# Altium PCB Modulo_Nodo.PcbDoc
Units mm, origin at the board's own origin, x right, y up, seen from the top; angles counter-clockwise.
Board outline 92.2 x 47.62 mm, 2 copper layers (Top Layer, Bottom Layer); 43 components, 40 nets, 199 pads, 6 vias.
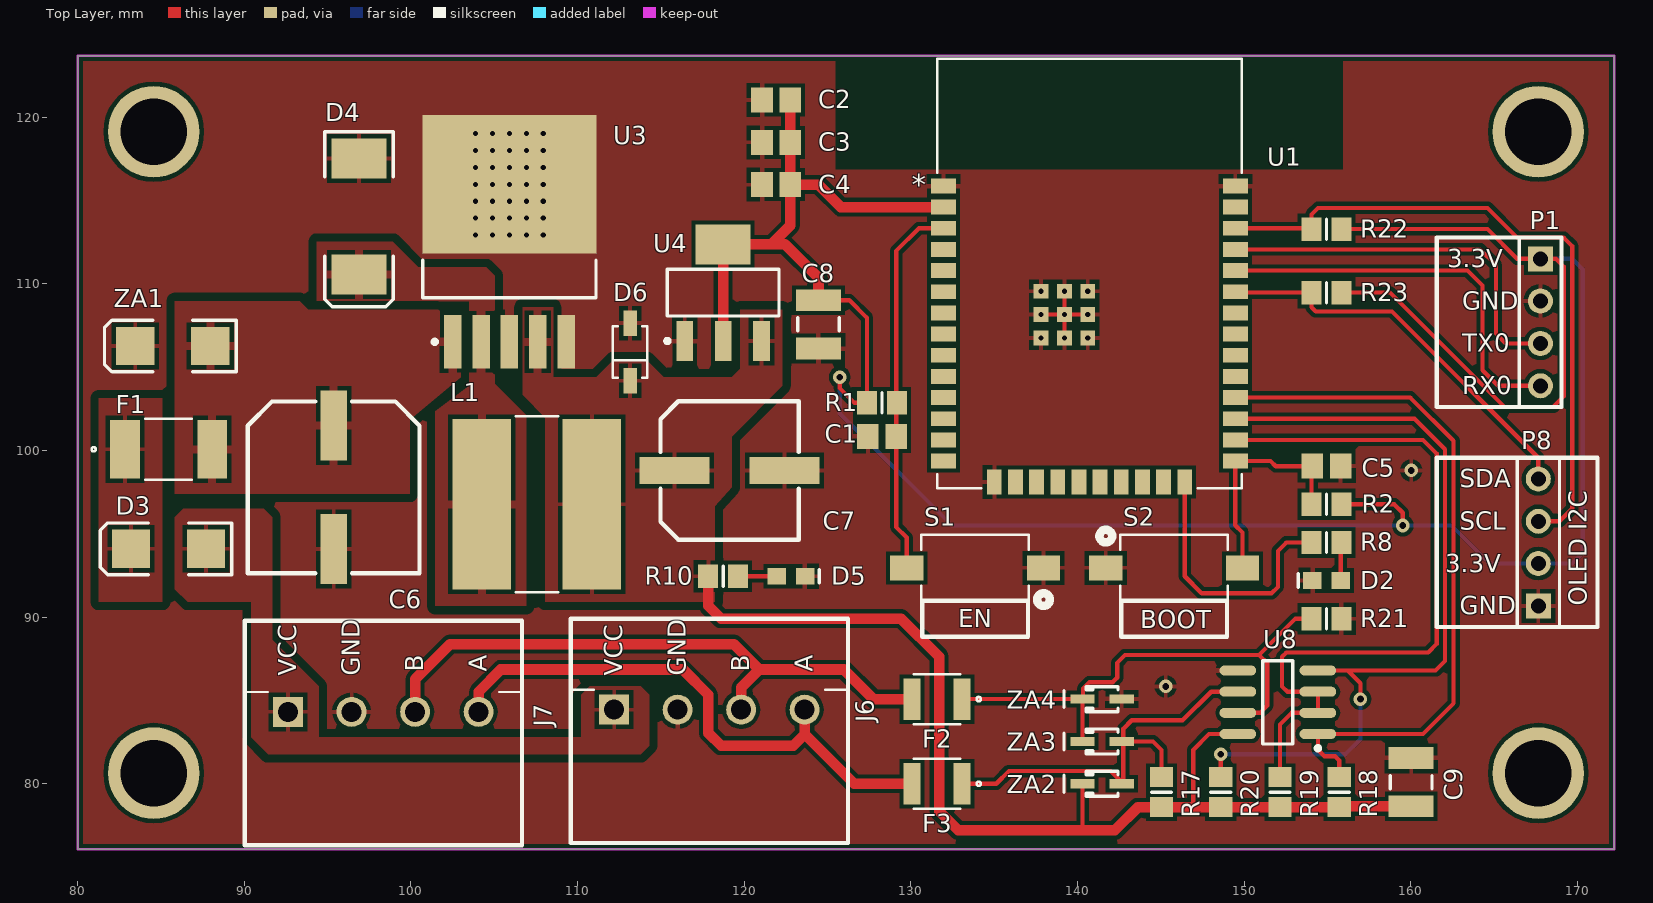
[diagram p0: Top Layer view]
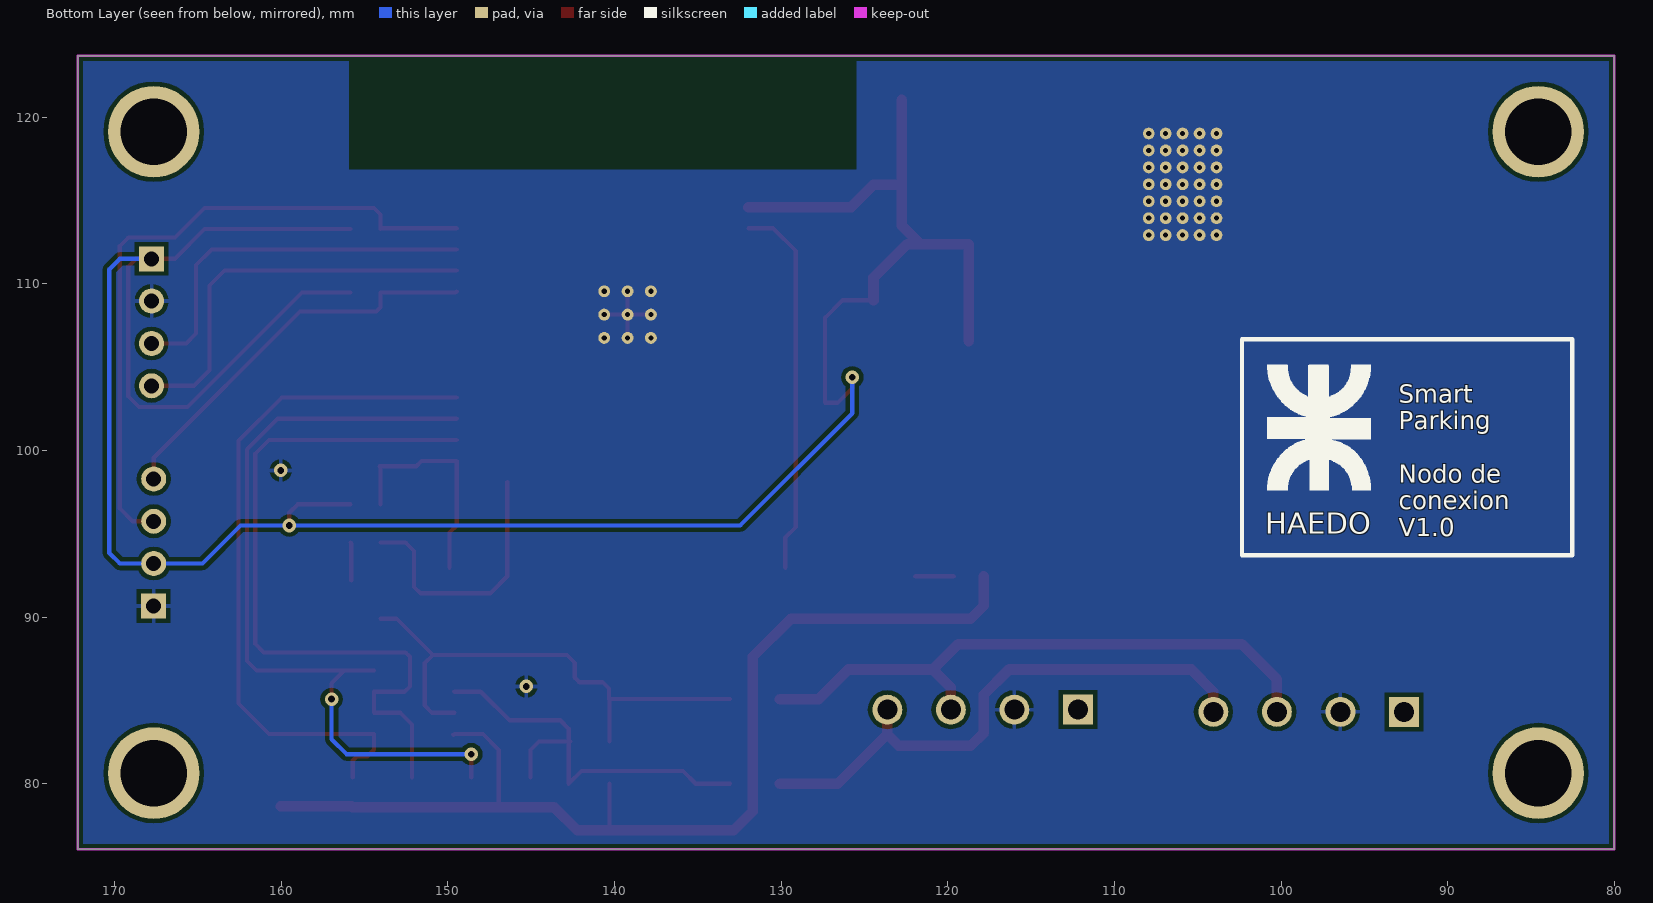
[diagram p1: Bottom Layer view, seen from below]
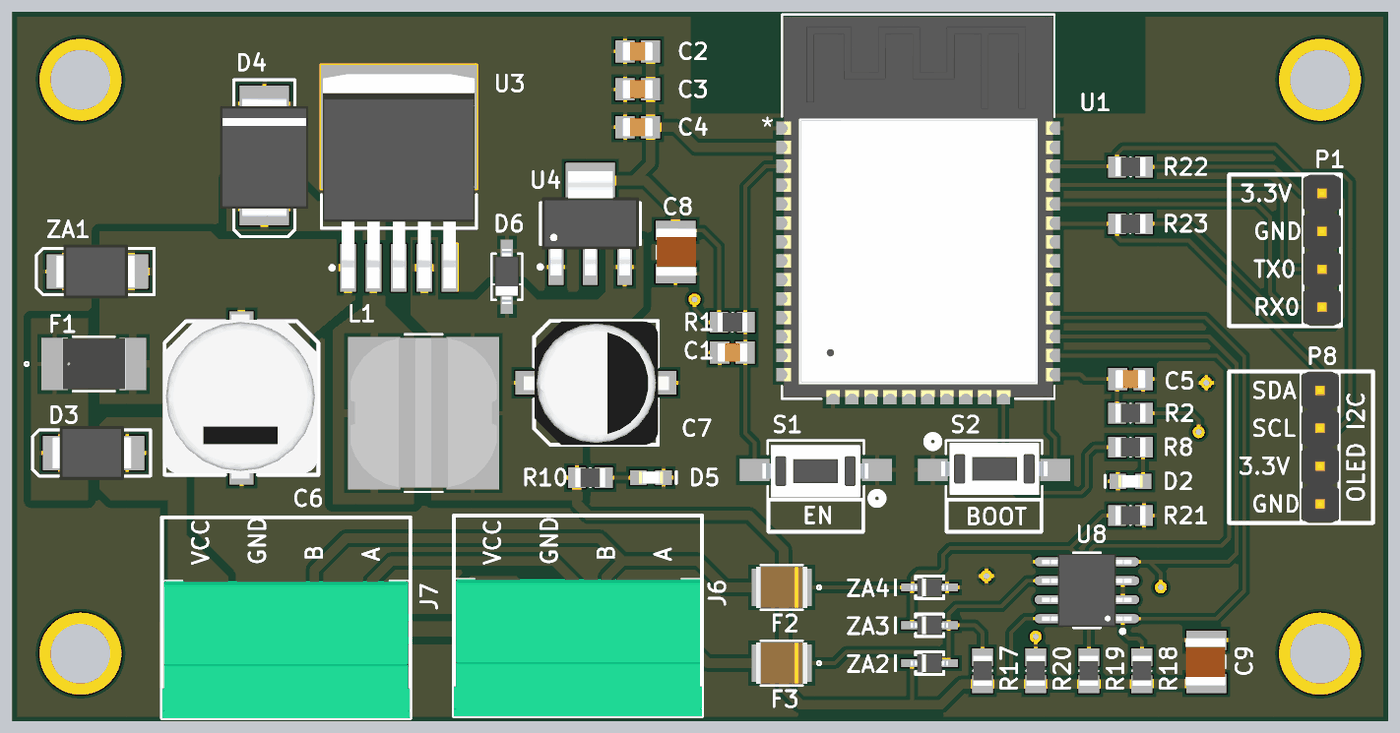
[diagram p2: 3D render of the assembled board from above, using the file's embedded part models]

## Layer stack, top to bottom
Top Solder: solder mask 0.0102, Solder Resist, Dk 3.5
Top Layer: signal copper 0.0356
Dielectric 1: dielectric 0.32, FR-4, Dk 4.8
Bottom Layer: signal copper 0.0356
Bottom Solder: solder mask 0.0102, Solder Resist, Dk 3.5

## Board outline
80.01,76.073 172.212,76.073 172.212,123.698 80.01,123.698

## Design rules (kind name [scope] priority, off if disabled: settings)
Clearance Clearance_6mil [InComponent('U2') OR InComponent('P2')] p1: gap=0.152
Clearance [All] p2: gap=0.254 except(0.508: Poly-Poly)
HoleSize [All] p1: absolutevalues=TRUE maxlimit=5 minlimit=0.025 maxpercent=80.000 minpercent=20.000
MinimumSolderMaskSliver [All] p1: minsoldermaskwidth=0.051
PolygonConnect DirectConnect [(ObjectKind = 'Pad') and (Name Like 'Free-DirectFree') or (Name Like 'U3-6') or (Name Like 'U3-5')] p1: connectstyle=Direct reliefconductorwidth=0.254 reliefentries=4 polygonreliefangle="90 Angle" airgapwidth=0.254
PolygonConnect LM2596 [InNet('NetD4_2') OR InNet('NetC6_1') OR (Name Like 'U3-4') OR (Name Like 'U3-2') or (Name Like 'U3-3')] p2: connectstyle=Relief reliefconductorwidth=0.508 reliefentries=4 polygonreliefangle="90 Angle" airgapwidth=0.254
PolygonConnect [All] p3: connectstyle=Relief reliefconductorwidth=0.254 reliefentries=4 polygonreliefangle="90 Angle" airgapwidth=0.254
RoutingVias [All] p1: holewidth=0.406 width=0.813 viastyle="Through Hole" minholewidth=0.406 minwidth=0.813 maxholewidth=0.406 maxwidth=0.813 viatemplateguid#1={61D454F8-26A4-4BA3-8065-2A80A06521EE} viatemplatename#1=v81h41
SilkToSilkClearance [All] p1: silktosilkclearance=0.051
SilkToSolderMaskClearance [IsPad] p1: minsilkscreentomaskgap=0.025 clearancetoexposedcopper=TRUE
SolderMaskExpansion [All] p1: expansion=0.102
Width [All] p1: maxlimit=0.635 minlimit=0.254 preferedwidth=0.254
26 further rules are at their usual default settings.

## Classes and differential pairs
component class Comunicaciones: C9 F2 F3 J6 J7 P8 R17 R18 R19 R20 R21 R22 R23 U8 ZA2 ZA3 ZA4
component class ESP32-WROOM-32E: C1 C2 C3 C4 C5 P1 R1 R2 S2 U1
component class Fuentes: C6 C7 C8 D3 D4 D5 D6 F1 L1 R10 U3 U4 ZA1
component class MainBoard: D2 R8

## Components (designator, comment, footprint, x,y, rotation, side; value= is the part's Value field where it differs from the comment)
C1 "100nF" CAPC2012N 128.27,100.838 r180 top
C2 "0.1uF" CAPC2012N 121.92,121.031 r180 top
C3 "0.1uF" CAPC2012N 121.92,118.491 r180 top
C4 "22uF" CAPC2012N 121.92,115.951 r180 top
C5 "100nF" CAPC2012N 154.94,99.06 r0 top
C6 "470uF" CapElecSMD_10mm 95.376,97.79 r90 top
C7 "330uF" CapElecSMD_8mm 119.126,98.806 r180 top
C8 "10uF" CAPC3225N 124.46,107.569 r270 top
C9 "1uF" CAPC3225N 160.02,80.102 r90 top
D2 "APT1608CGCK" ChipDiode1608 154.94,92.202 r180 top
D3 "RS3JB-13-F" SMB 85.471,94.107 r180 top
D4 "B540C-13-F" SMC 96.9,114.046 r270 top
D5 "APT1608CGCK" ChipDiode1608 122.808,92.456 r0 top
D6 "MMSZ5V6T1G" SOD-123_ONS-M 113.156,105.918 r90 top
F1 "PTS18126V300" FUSE_PTS18126_COB 85.471,100.076 r0 top
F2 "MF-USMF050-2" MF-USMF050-2 131.572,85.09 r180 top
F3 "MF-USMF050-2" MF-USMF050-2 131.572,80.01 r180 top
J6 "TERMBLOCK_3.81MM" TERMBLOCK_3.81MM_90DEG_4POS 117.983,81.534 r0 top
J7 "TERMBLOCK_3.81MM" TERMBLOCK_3.81MM_90DEG_4POS 98.425,81.407 r0 top
L1 "47uH" INDUCTOR_47UH_3A 107.568,96.774 r0 top
P1 "USB-TTL" CONNHDR_1X4_2.54MM 167.64,107.696 r270 top
P8 "OLED I2C" CONNHDR_1X4_2.54MM 167.767,94.488 r90 top
R1 "10MΩ" RESC2012N 128.27,102.87 r180 top
R2 "10MΩ" RESC2012N 154.94,96.774 r0 top
R8 "1k" RESC2012N 154.94,94.488 r180 top
R10 "1k" RESC2012N 118.744,92.456 r180 top
R17 "100K" RESC2012N 145.034,79.502 r270 top
R18 "10K" RESC2012N 155.702,79.502 r270 top
R19 "10K" RESC2012N 152.146,79.502 r270 top
R20 "10K" RESC2012N 148.59,79.502 r270 top
R21 "100K" RESC2012N 154.94,89.916 r180 top
R22 "4.7k" RESC2012N 154.94,113.284 r0 top
R23 "4.7k" RESC2012N 154.94,109.474 r0 top
S1 "RESET" "SWITCH TACTILE SPST-NO 0.05A 12V" 133.858,92.964 r180 top
S2 "BOOT" "SWITCH TACTILE SPST-NO 0.05A 12V" 145.796,92.964 r0 top
U1 "ESP32-WROOM-32E" ESP32-WROOM-32E 140.716,110.617 r0 top
U3 "LM2596S-5.0" LM2596S-5.0 106.044,112.522 r90 top
U4 "TLV1117LV33" SOT223 118.744,109.474 r90 top
U8 "MAX485" MAX485 152.019,84.9 r180 top
ZA1 "P6SMB33CA" SMB 85.724,106.268 r180 top
ZA2 "SD12C-7" SOD-323 141.478,80.01 r180 top
ZA3 "SD12C-7" SOD-323 141.478,82.55 r180 top
ZA4 "SD12C-7" SOD-323 141.478,85.09 r180 top

## Footprints (in the part's own frame and the unit in brackets; to place one, negate y for a bottom-side part, rotate by r counter-clockwise, add the part's x,y. Pads: shape width x height; smd on the part's side, far side on the other; paste and mask are expansions set on the pad)
CAPC2012N [mm] "Chip Capacitor (Imperial: 0805, Metric: 2012)"
  rect 1.3x1.5 smd: 1(-0.85,0) 2(0.85,0)
  body extent -1,-0.62 1,0.63, height 0.88
CAPC3225N [mm] "Chip Capacitor, Body 3.2x2.5mm, IPC Medium Density"
  rect 1.3x2.7 smd: 1(-1.45,0) 2(1.45,0)
  silkscreen extent -0.4,-1.25 0.4,1.25, body extent -1.6,-1.3 1.6,1.4, height 2.44
CapElecSMD_8mm [mm]
  rect 4.2x1.6 smd: 1(3.3,0) 2(-3.3,0)
  silkscreen extent -4.15,-4.15 4.15,4.15, body extent -4.88,-4.12 4.82,4.17, height 10.2
CapElecSMD_10mm [mm]
  rect 4.2x1.6 smd: 1(3.7,0) 2(-3.7,0)
  silkscreen extent -5.15,-5.15 5.15,5.15, body extent -5.4,-5.07 5.6,5.23, height 12.52
ChipDiode1608 [mm] "Chip Diode; 0603 (1608 Metric)"
  rect 1.1x1 smd: 1(-0.85,0) 2(0.85,0)
  silkscreen extent 1.7,-0.4 1.7,0.4, body extent -0.8,-0.4 0.8,0.4, height 0.75
CONNHDR_1X4_2.54MM [mm] "CONN HEADER VERT 4POS 2.54MM"
  rect 1.5x1.5 hole 0.9: 1(-3.81,0.127)
  round 1.5 hole 0.9: 2(-1.27,0.127) 3(1.27,0.127) 4(3.81,0.127)
  silkscreen extent -5.08,-1.14 5.08,1.4, body extent -5.08,-1.14 5.08,1.4, height 8.54
ESP32-WROOM-32E [mil] "ESP32-WROOM-32E con antena integrada."
  rect 59x35 smd paste+0 mask+0: 1(-344.5,207.1) 2(-344.5,157.1) 3(-344.5,107.1) 4(-344.5,57.1) 5(-344.5,7.1) 6(-344.5,-42.9) 7(-344.5,-92.9) 8(-344.5,-142.9) 9(-344.5,-192.9) 10(-344.5,-242.9) 11(-344.5,-292.9) 12(-344.5,-342.9) 13(-344.5,-392.9) 14(-344.5,-442.9) 25(344.5,-442.9) 26(344.5,-392.9) 27(344.5,-342.9) 28(344.5,-292.9) 29(344.5,-242.9) 30(344.5,-192.9) 31(344.5,-142.9) 32(344.5,-92.9) 33(344.5,-42.9) 34(344.5,7.1) 35(344.5,57.1) 36(344.5,107.1) 37(344.5,157.1) 38(344.5,207.1)
  rect 35x59 smd paste+0 mask+0: 15(-225,-492.15) 16(-175,-492.15) 17(-125,-492.15) 18(-75,-492.15) 19(-25,-492.15) 20(25,-492.15) 21(75,-492.15) 22(125,-492.15) 23(175,-492.15) 24(225,-492.15)
  rect 35x35 smd paste+0 mask+0: 39(-59.1,-96.9) 40(-114.2,-41.8) 41(-114.2,-96.9) 42(-114.2,-152) 43(-59.1,-152) 44(-4,-152) 45(-4,-96.9) 46(-4,-41.8) 47(-59.1,-41.8)
  silkscreen extent -360,-507 360,507, body extent -354,-502 355,502, height 128
FUSE_PTS18126_COB [mil]
  rect 70x138 smd paste+0 mask+0: 1(-102.95,0) 2(102.95,0)
  silkscreen extent -182,-72 55,72, body extent -84,-69 84,69, height 47
INDUCTOR_47UH_3A [mil] "CIAA_NXP"
  rect 138x402 smd paste+0 mask+0: 1(-130,0) 2(130,0)
  silkscreen extent -50,-208 50,208, body extent -193,-196 193,198, height 236
LM2596S-5.0 [mm] "IC REG BUCK 5V 3A TO263-5L"
  rect 3.2x1.05 smd: 1(-6,3.527) 2(-6,1.827) 3(-6,0.127) 4(-6,-1.573) 5(-6,-3.273)
  rect 8.3x10.45 smd: 6(3.45,0.127)
  silkscreen extent -6.12,-5.07 -1.1,5.33, body extent -7.37,-4.95 6.98,5.21, height 4.65
MAX485 [mm] "IC TRANSCEIVER HALF 1/1 8SOIC"
  oval 2.2x0.6 smd: 1(-2.4,1.905) 2(-2.4,0.635) 3(-2.4,-0.635) 4(-2.4,-1.905) 5(2.4,-1.905) 6(2.4,-0.635) 7(2.4,0.635) 8(2.4,1.905)
  silkscreen extent -2.53,-2.5 0.9,2.88, body extent -3,-2.45 3,2.45, height 1.75
MF-USMF050-2 [mm]
  rect 1x2.5 smd paste+0 mask+0: 1(-1.5,0) 2(1.5,0)
  silkscreen extent -2.63,-1.5 1.4,1.5, body extent -1.71,-1.4 1.71,1.4, height 1.09
RESC2012N [mm] "Chip Resistor (Imperial: 0805, Metric: 2012)"
  rect 1.2x1.4 smd: 1(-0.9,0) 2(0.9,0)
  silkscreen extent 0,-0.6 0,0.6, body extent -1,-0.62 1,0.63, height 0.65
SMB [mm] "DO-214-AA/SMB; 2 C-Bend Leads; Body 5.3 x 3.6 mm, inc. leads (LxW)"
  rect 2.3x2.3 smd: 1(-2.25,0) 2(2.25,0)
  silkscreen extent -3.8,-1.55 4.1,1.55, body extent -2.52,-1.81 2.77,1.81, height 2.5
SMC [mm] "DO-214-AB/SMC; 2 C-Bend Leads; Body 7.9 x 5.9 mm, inc. leads (LxW)"
  rect 2.4x3.3 smd: 1(-3.475,0) 2(3.475,0)
  silkscreen extent -5.07,-2.05 5.43,2.05, body extent -3.84,-2.95 4.1,2.95, height 2.5
SOD-123_ONS-M [mil] "MMSZ5V6T1G"
  rect 60x32 smd paste+0 mask+0: 1(-68,0) 2(68,0)
  silkscreen extent -61,-41 61,41, body extent -71,-31 73,31, height 53
SOD-323 [mm] "SOD-323/SC-76; 2 Leads; Body 1.7 x 1.3 mm, (LxW)"
  rect 1.45x0.55 smd: 1(1.175,0) 2(-1.175,0)
  silkscreen extent -0.95,-0.75 2.29,0.75, body extent -1.25,-0.62 1.25,0.62, height 1
SOT223 [mm] "SOT223, 4-Leads, Body 6.5x3.5mm, Pitch 2.3mm, Lead Span 7mm, IPC Medium Density"
  rect 2.4x1 smd: 1(-2.9,2.3) 2(-2.9,0) 3(-2.9,-2.3)
  rect 2.4x3.3 smd: 4(2.9,0)
  silkscreen extent -3.02,-3.35 1.4,3.47, body extent -3.47,-3.25 3.52,3.25, height 1.8
"SWITCH TACTILE SPST-NO 0.05A 12V" [mil] "PTS636 SM50 SMTR LFS"
  rect 79x59 smd paste+0 mask+0: 1(-161.42,0) 2(161.42,0)
  silkscreen extent -176,-78 127,90, body extent -139,-66 141,72, height 169
TERMBLOCK_3.81MM_90DEG_4POS [mm]
  rect 1.8x1.8 / inner round 1.8 / far side rect 1.8x1.8 hole 1.2: 01(-5.782,2.92)
  round 1.8 hole 1.2: 02(-1.972,2.92) 03(1.838,2.92) 04(5.648,2.92)
  silkscreen extent -8.38,-5.08 8.25,4.12, body extent -8.38,-5.08 8.25,4.12, height 7.31

## Part data
C1 C2 C3 C4 C5: library part Cap, "Capacitor"
C6 C7 C8 C9: library part "Cap Pol3", "Polarized Capacitor (Surface Mount)"
D2 D5: library part LED2, "LED 1.6x0.8 mm 570 nm GRN CLR SMD"
D3 D4: library part Diode, "Default Diode"
D6: library part "D Zener", "Zener Diode"
F1: "PTC RESET FUSE 6V 3A 1812"
F2 F3: library part PTS18126V300, "PTC RESET FUSE 6V 3A 1812"
J6 J7: library part TERMBLOCK_3.81MM_90DEG_4POS, "TERMBLOCK_3.81MM_90DEG_4POS (DigiKey: 1803293)"
L1: library part Inductor, "Inductor"
P1 P8: library part MHDR1X4, "Header, 4-Pin"
R1 R2: library part Res1, "Resistor"
R8 R10 R17 R18 R19 R20 R21: library part Res3, "Resistor"
R22 R23: library part Res2, "Resistor"
S1 S2: library part SW-PB, "Switch"
U3: "IC REG BUCK 5V 3A TO263-5L"
U4: "1-A, Positive Fixed Voltage, Low-Dropout Regulator"
U8: "Low-Power RS-485/RS-422 Multipoint Transceiver, 8-pin Narrow SOIC"
ZA1 ZA2 ZA3 ZA4: library part "TVS Diode", "Transient voltage suppressor diode"

## Free pads (board coordinates)
  round 5.5 hole 4: DirectFree(84.582,80.645) DirectFree(84.582,119.126) DirectFree(167.64,80.645) DirectFree(167.64,119.126)
  round 0.711 hole 0.305: DirectFree(103.885,112.924) DirectFree(103.885,113.94) DirectFree(103.885,114.956) DirectFree(103.885,115.972) DirectFree(103.885,116.988) DirectFree(103.885,118.004) DirectFree(103.885,119.02) DirectFree(104.901,112.924) DirectFree(104.901,113.94) DirectFree(104.901,114.956) DirectFree(104.901,115.972) DirectFree(104.901,116.988) DirectFree(104.901,118.004) DirectFree(104.901,119.02) DirectFree(105.917,112.924) DirectFree(105.917,113.94) DirectFree(105.917,114.956) DirectFree(105.917,115.972) DirectFree(105.917,116.988) DirectFree(105.917,118.004) DirectFree(105.917,119.02) DirectFree(106.933,112.924) DirectFree(106.933,113.94) DirectFree(106.933,114.956) DirectFree(106.933,115.972) DirectFree(106.933,116.988) DirectFree(106.933,118.004) DirectFree(106.933,119.02) DirectFree(107.949,112.924) DirectFree(107.949,113.94) DirectFree(107.949,114.956) DirectFree(107.949,115.972) DirectFree(107.949,116.988) DirectFree(107.949,118.004) DirectFree(107.949,119.02) DirectFree(137.815,106.756) DirectFree(137.815,108.156) DirectFree(137.815,109.555) DirectFree(139.215,106.756) DirectFree(139.215,108.156) DirectFree(139.215,109.555) DirectFree(140.614,106.756) DirectFree(140.614,108.156) DirectFree(140.614,109.555)

## Via types
v1: diameter 0.813, hole 0.406, Top Layer to Bottom Layer, 6 vias

## Nets (pads, with @x,y where several pads share a name; then routed paths per layer and width w, separated by ;. In a path a pad name is that pad's centre, name@x,y a point inside that pad or via, vN(x,y) a via of type N, cw(c..) or ccw(c..) an arc to the next point about the centre after c; other vN are vias at no path point)
+3.3V: C2.1 C3.1 C4.1 C8.1 P1.1 P8.2 R1.2 R2.2 R22.2 R23.2 U1.2 U4.2 U4.4 | length 157.3
  Top Layer w0.254: C8.1 126.312,109.019 127.37,107.961 127.37,102.863 126.626,102.863 125.73,103.759 v1(125.73,104.394) ; R2.2 159.004,96.774 159.512,96.266 v1(159.512,95.504) ; R23.2 158.75,109.474 165.608,102.616 168.529,102.616 169.164,103.251 169.164,111.042 168.7,111.506 P1.1 166.37,111.506 164.592,113.284 R22.2
  Top Layer w0.635: U4.2 U4.4 121.645,112.374 ; C2.1 C3.1 C4.1 ; C8.1 124.46,110.363 122.449,112.374 121.645,112.374 ; U1.2 125.804,114.607 124.46,115.951 C4.1 ; 121.645,112.374 122.77,113.499 C4.1
  Bottom Layer w0.254: v1(125.73,104.394) 125.73,102.235 132.461,95.504 v1(159.512,95.504) 162.433,95.504 164.719,93.218 P8.2 169.672,93.218 170.307,93.853 170.307,110.871 169.672,111.506 P1.1
"+5 V": C7.1 C9.1 D6.1 L1.2 R10.2 R17.2 R18.2 R19.2 R20.2 U3.4 U4.3 U8.8 ZA2.1 | length 64.9
  Top Layer w0.254: ZA2.1 140.303,77.248 140.335,77.216 ; 146.939,78.602 146.939,82.042 147.892,82.995 U8.8 U8.8@149.668,82.945
  Top Layer w0.635: R10.2 117.844,90.69 118.618,89.916 129.413,89.916 131.699,87.63 131.699,78.359 132.842,77.216 140.335,77.216 142.24,77.216 143.626,78.602 R17.2 146.939,78.602 R20.2 R19.2 R18.2 155.752,78.652 C9.1
EN: C1.1 R1.1 S1.2 U1.3 | length 22.7
  Top Layer w0.254: S1.2 129.758,94.778 129.12,95.416 129.12,111.975 130.482,113.337 U1.3
GND: C1.2 C2.2 C3.2 C4.2 C5.2 C6.2 C7.2 C8.2 C9.2 D2.2 D4.1 D5.2 D6.2 J6.02 J7.02 P1.2 P8.1 pad.DirectFree@103.885,112.924 pad.DirectFree@103.885,113.94 pad.DirectFree@103.885,114.956 pad.DirectFree@103.885,115.972 pad.DirectFree@103.885,116.988 pad.DirectFree@103.885,118.004 pad.DirectFree@103.885,119.02 pad.DirectFree@104.901,112.924 pad.DirectFree@104.901,113.94 pad.DirectFree@104.901,114.956 pad.DirectFree@104.901,115.972 pad.DirectFree@104.901,116.988 pad.DirectFree@104.901,118.004 pad.DirectFree@104.901,119.02 pad.DirectFree@105.917,112.924 pad.DirectFree@105.917,113.94 pad.DirectFree@105.917,114.956 pad.DirectFree@105.917,115.972 pad.DirectFree@105.917,116.988 pad.DirectFree@105.917,118.004 pad.DirectFree@105.917,119.02 pad.DirectFree@106.933,112.924 pad.DirectFree@106.933,113.94 pad.DirectFree@106.933,114.956 pad.DirectFree@106.933,115.972 pad.DirectFree@106.933,116.988 pad.DirectFree@106.933,118.004 pad.DirectFree@106.933,119.02 pad.DirectFree@107.949,112.924 pad.DirectFree@107.949,113.94 pad.DirectFree@107.949,114.956 pad.DirectFree@107.949,115.972 pad.DirectFree@107.949,116.988 pad.DirectFree@107.949,118.004 pad.DirectFree@107.949,119.02 pad.DirectFree@137.815,106.756 pad.DirectFree@137.815,108.156 pad.DirectFree@137.815,109.555 pad.DirectFree@139.215,106.756 pad.DirectFree@139.215,108.156 pad.DirectFree@139.215,109.555 pad.DirectFree@140.614,106.756 pad.DirectFree@140.614,108.156 pad.DirectFree@140.614,109.555 R21.1 S1.1 S2.1 U1.1 U1.15 U1.38 U1.39 U1.40 U1.41 U1.42 U1.43 U1.44 U1.45 U1.46 U1.47 U3.3 U3.5 U3.6 U4.1 U8.5 ZA1.2 ZA4.2 | length 5.6
  Top Layer w0.254: U1.41 U1.39 ; U1.43 U1.39 ; U1.47 U1.39 ; U1.45 U1.39
  other v1: 145.288,85.852 160.02,98.806
IO0: C5.1 R2.1 S2.2 U1.25 | length 13.6
  Top Layer w0.254: S2.2 149.896,95.087 149.466,95.517 U1.25 151.585,99.367 151.892,99.06 C5.1 154.04,99.01 R2.1
NetC6_1: C6.1 F1.2 U3.1 ZA1.1
NetD2_1: D2.1 R8.1 | length 2.3
  Top Layer w0.254: D2.1 155.79,94.438 R8.1
NetD4_2: D4.2 L1.1 U3.2
NetD5_1: D5.1 R10.1 | length 2.3
  Top Layer w0.254: R10.1 D5.1
NetF2_1: F2.1 R21.2 U8.7 ZA3.1 ZA4.1 | length 31.6
  Top Layer w0.254: F2.1 ZA4.1 ; ZA3.1 ZA4.1 ; U8.7 150.939,84.264 151.384,84.709 151.384,87.249 150.897,87.736 ; R21.2 153.076,89.916 150.897,87.736 ; ZA4.1 140.335,85.09 140.335,85.725 140.716,86.106 142.113,86.106 142.378,86.371 142.378,87.26 142.854,87.736 150.897,87.736
NetF2_2: F2.2 J6.03 J7.03 | length 36.9
  Top Layer w0.635: J7.03 100.263,86.293 102.362,88.392 119.38,88.392 120.904,86.868 ; J6.03 119.821,85.785 120.904,86.868 ; F2.2 127.762,85.09 125.984,86.868 120.904,86.868
NetF3_1: F3.1 R17.1 U8.6 ZA2.2 ZA3.2 | length 25.6
  Top Layer w0.254: F3.1 135.128,80.01 135.89,80.772 141.986,80.772 142.748,80.01 ZA3.2@142.748,82.55 ; ZA3.2 ZA3.2@142.748,82.55 ; R17.1 145.034,82.042 144.526,82.55 ZA3.2@142.748,82.55 ; U8.6 148.018,85.534 146.304,83.82 143.256,83.82 142.748,83.312 ZA3.2@142.748,82.55
NetF3_2: F3.2 J6.04 J7.04 | length 34
  Top Layer w0.635: J7.04 104.073,85.531 105.41,86.868 116.332,86.868 117.856,85.344 117.856,83.058 118.618,82.296 122.936,82.296 123.631,82.991 ; J6.04 123.631,82.991 ; F3.2 126.612,80.01 123.631,82.991
NetR8_2: R8.2 U1.24 | length 16.2
  Top Layer w0.254: U1.24 146.431,92.456 147.447,91.44 151.638,91.44 152.019,91.821 152.019,93.98 152.527,94.488 R8.2
NetU1_4: U1.4
NetU1_5: U1.5
NetU1_6: U1.6
NetU1_7: U1.7
NetU1_8: U1.8
NetU1_9: U1.9
NetU1_10: U1.10
NetU1_11: U1.11
NetU1_12: U1.12
NetU1_13: U1.13
NetU1_14: U1.14
NetU1_16: U1.16
NetU1_23: U1.23
NetU1_29: U1.29
NetU1_30: U1.30
NetU1_31: U1.31
NetU1_37: U1.37
OLED_SCL: P8.3 R22.1 U1.36 | length 40.3
  Top Layer w0.254: U1.36 153.987,113.337 R22.1 154.04,114.162 154.432,114.554 164.592,114.554 166.37,112.776 169.164,112.776 169.672,112.268 169.672,96.52 168.91,95.758 P8.3
OLED_SDA: P8.4 R23.1 U1.33 | length 24.1
  Top Layer w0.254: U1.33 149.52,109.474 R23.1 154.04,108.596 154.294,108.342 158.866,108.342 167.64,99.568 P8.4
RS485_DIR: R19.1 U1.26 U8.2 U8.3 | length 44.5
  Top Layer w0.254: U1.26 160.729,100.637 161.544,99.822 161.544,88.392 161.036,87.884 152.527,87.884 152.273,87.63 152.273,85.852 152.59,85.534 U8.3 U8.2 152.844,84.264 152.146,83.566 R19.1
RS485_RXD: R18.1 U1.28 U8.1 | length 42.3
  Top Layer w0.254: U1.28 149.466,103.189 159.955,103.189 162.56,100.584 162.56,84.836 160.719,82.995 U8.1 154.419,82.055 154.813,81.661 155.448,81.661 155.702,81.407 R18.1
RS485_TXD: R20.1 U1.27 U8.4 | length 48.5
  Top Layer w0.254: R20.1 v1(148.59,81.788) ; U1.27 160.221,101.907 162.052,100.076 162.052,87.376 161.481,86.804 156.21,86.804 ; U8.4 156.21,86.804 ; v1(156.972,85.09) 156.972,86.042 156.21,86.804
  Bottom Layer w0.254: v1(148.59,81.788) 156.083,81.788 156.972,82.677 v1(156.972,85.09)
RXD0: P1.4 U1.34 | length 24.1
  Top Layer w0.254: U1.34 163.396,110.797 164.294,109.899 164.294,104.819 165.227,103.886 P1.4
TXD0: P1.3 U1.35 | length 23
  Top Layer w0.254: U1.35 164.158,112.067 165.1,111.125 165.1,107.017 165.691,106.426 P1.3
VCC: D3.2 F1.1
VIN: D3.1 J6.01 J7.01
pads on no net: U1.17 U1.18 U1.19 U1.20 U1.21 U1.22 U1.32

## Polygon pours and split planes (outlines as drawn)
GND on Top Layer "GND_TOP" (solid, pour order 18): 80.01,123.698 125.476,123.698 125.476,116.84 155.956,116.84 155.956,123.698 172.212,123.698 172.212,76.073 80.01,76.073
NetC6_1 on Top Layer "Cin" (solid, pour order 0): 99.949,97.409 99.949,101.854 102.997,104.394 102.997,108.458 93.853,108.458 93.345,108.966 86.36,108.966 85.852,108.966 85.852,97.409
VCC on Top Layer "VCC" (solid, pour order 16): 85.09,90.932 85.09,103.124 81.28,103.124 81.28,90.932
VIN on Top Layer "VIN" (solid, pour order 8): 86.36,96.52 91.186,96.52 91.694,96.012 91.694,88.646 94.488,85.852 94.488,82.804 110.236,82.804 110.236,85.344 110.744,85.852 113.792,85.852 114.3,85.344 114.3,82.296 113.792,81.788 91.44,81.788 90.424,82.804 90.424,84.836 90.424,90.932 86.614,90.932 85.852,91.694 85.852,96.012
NetD4_2 on Top Layer "POLY-LM2596-D4" (solid, pour order 2): 94.36,112.522 94.36,109.474 94.36,108.966 94.868,108.966 103.504,108.966 103.504,103.886 101.472,102.362 101.472,101.346 101.472,90.678 106.934,90.678 106.934,102.108 105.028,104.014 105.028,110.49 104.52,110.998 100.456,110.998 98.932,112.522 96.9,112.522
"+5 V" on Top Layer "5V" (solid, pour order 6): 118.237,90.932 118.237,96.647 119.252,97.79 119.252,100.837 122.301,103.886 122.301,108.458 119.761,108.458 119.761,104.902 119.253,104.394 115.188,104.394 114.172,105.41 112.14,105.41 111.124,104.394 108.534,104.394 108.534,108.585 106.705,108.585 106.705,103.353 108.077,101.981 108.077,90.932
GND on Bottom Layer "GND_BOTTOM" (solid, pour order 14): 80.01,123.698 125.476,123.698 125.476,116.84 155.956,116.84 155.956,123.698 172.212,123.698 172.212,76.073 80.01,76.073

## Keep-outs
Keep-Out Layer:
  the board outline again, w0.152

## Silkscreen, mask and mechanical layers (free items; w line width, h text height)
Top Overlay:
  lines w0.254: 90.043,76.327 90.043,89.789 106.68,89.789 106.68,76.327 90.043,76.327 ; 109.601,76.454 126.238,76.454 126.238,89.916 109.601,89.916 109.601,76.454 ; 130.683,88.824 130.683,90.983 137.033,90.983 137.033,88.824 130.683,88.824 ; 142.621,88.824 148.971,88.824 148.971,90.983 142.621,90.983 142.621,88.824 ; 161.544,89.408 171.196,89.408 171.196,99.568 161.544,99.568 161.544,89.408 ; 161.544,102.616 169.037,102.616 169.037,112.776 161.544,112.776 161.544,102.616
  text "3.3V" at 162.179,110.998 h1.07
  text "GND" at 163.068,108.458 h1.07
  text "TX0" at 163.068,105.918 h1.07
  text "RX0" at 163.068,103.378 h1.07
  text "SDA" at 162.941,97.79 h1.07
  text "SCL" at 162.941,95.25 h1.07
  text "3.3V" at 162.052,92.71 h1.07
  text "GND" at 162.941,90.17 h1.07
  text "EN" at 132.842,89.408 h1.07
  text "BOOT" at 143.764,89.332 h1.07
  text "B" at 100.76,86.741 h1.07 r90
  text "A" at 104.57,86.741 h1.07 r90
  text "B" at 120.318,86.741 h1.07 r90
  text "A" at 124.128,86.741 h1.07 r90
  text "VCC" at 93.14,86.487 h1.07 r90
  text "GND" at 96.95,86.487 h1.07 r90
  text "VCC" at 112.698,86.487 h1.07 r90
  text "GND" at 116.508,86.487 h1.07 r90
Bottom Overlay:
  drawing of 5 lines, arcs and shapes, not listed
  text "HAEDO" at 100.965,94.996 h1.27
  text "Smart / Parking /  / Nodo de / conexion / V1.0" at 92.964,94.869 h1.07

## Text inside footprints (layer, text, board x,y; h text height)
U1: Top Overlay "*" at 130.048,115.316 h1.27